# Altium PCB 电机驱动板-V5.0.PcbDoc (part 2 of 3)
Units mil, origin at the board's own origin, x right, y up, seen from the top; angles counter-clockwise.
Board outline 4724.41 x 4330.71 mil, 4 copper layers (Top Layer, NET-A, GND-A, Bottom Layer); 312 components, 201 nets, 977 pads, 515 vias.
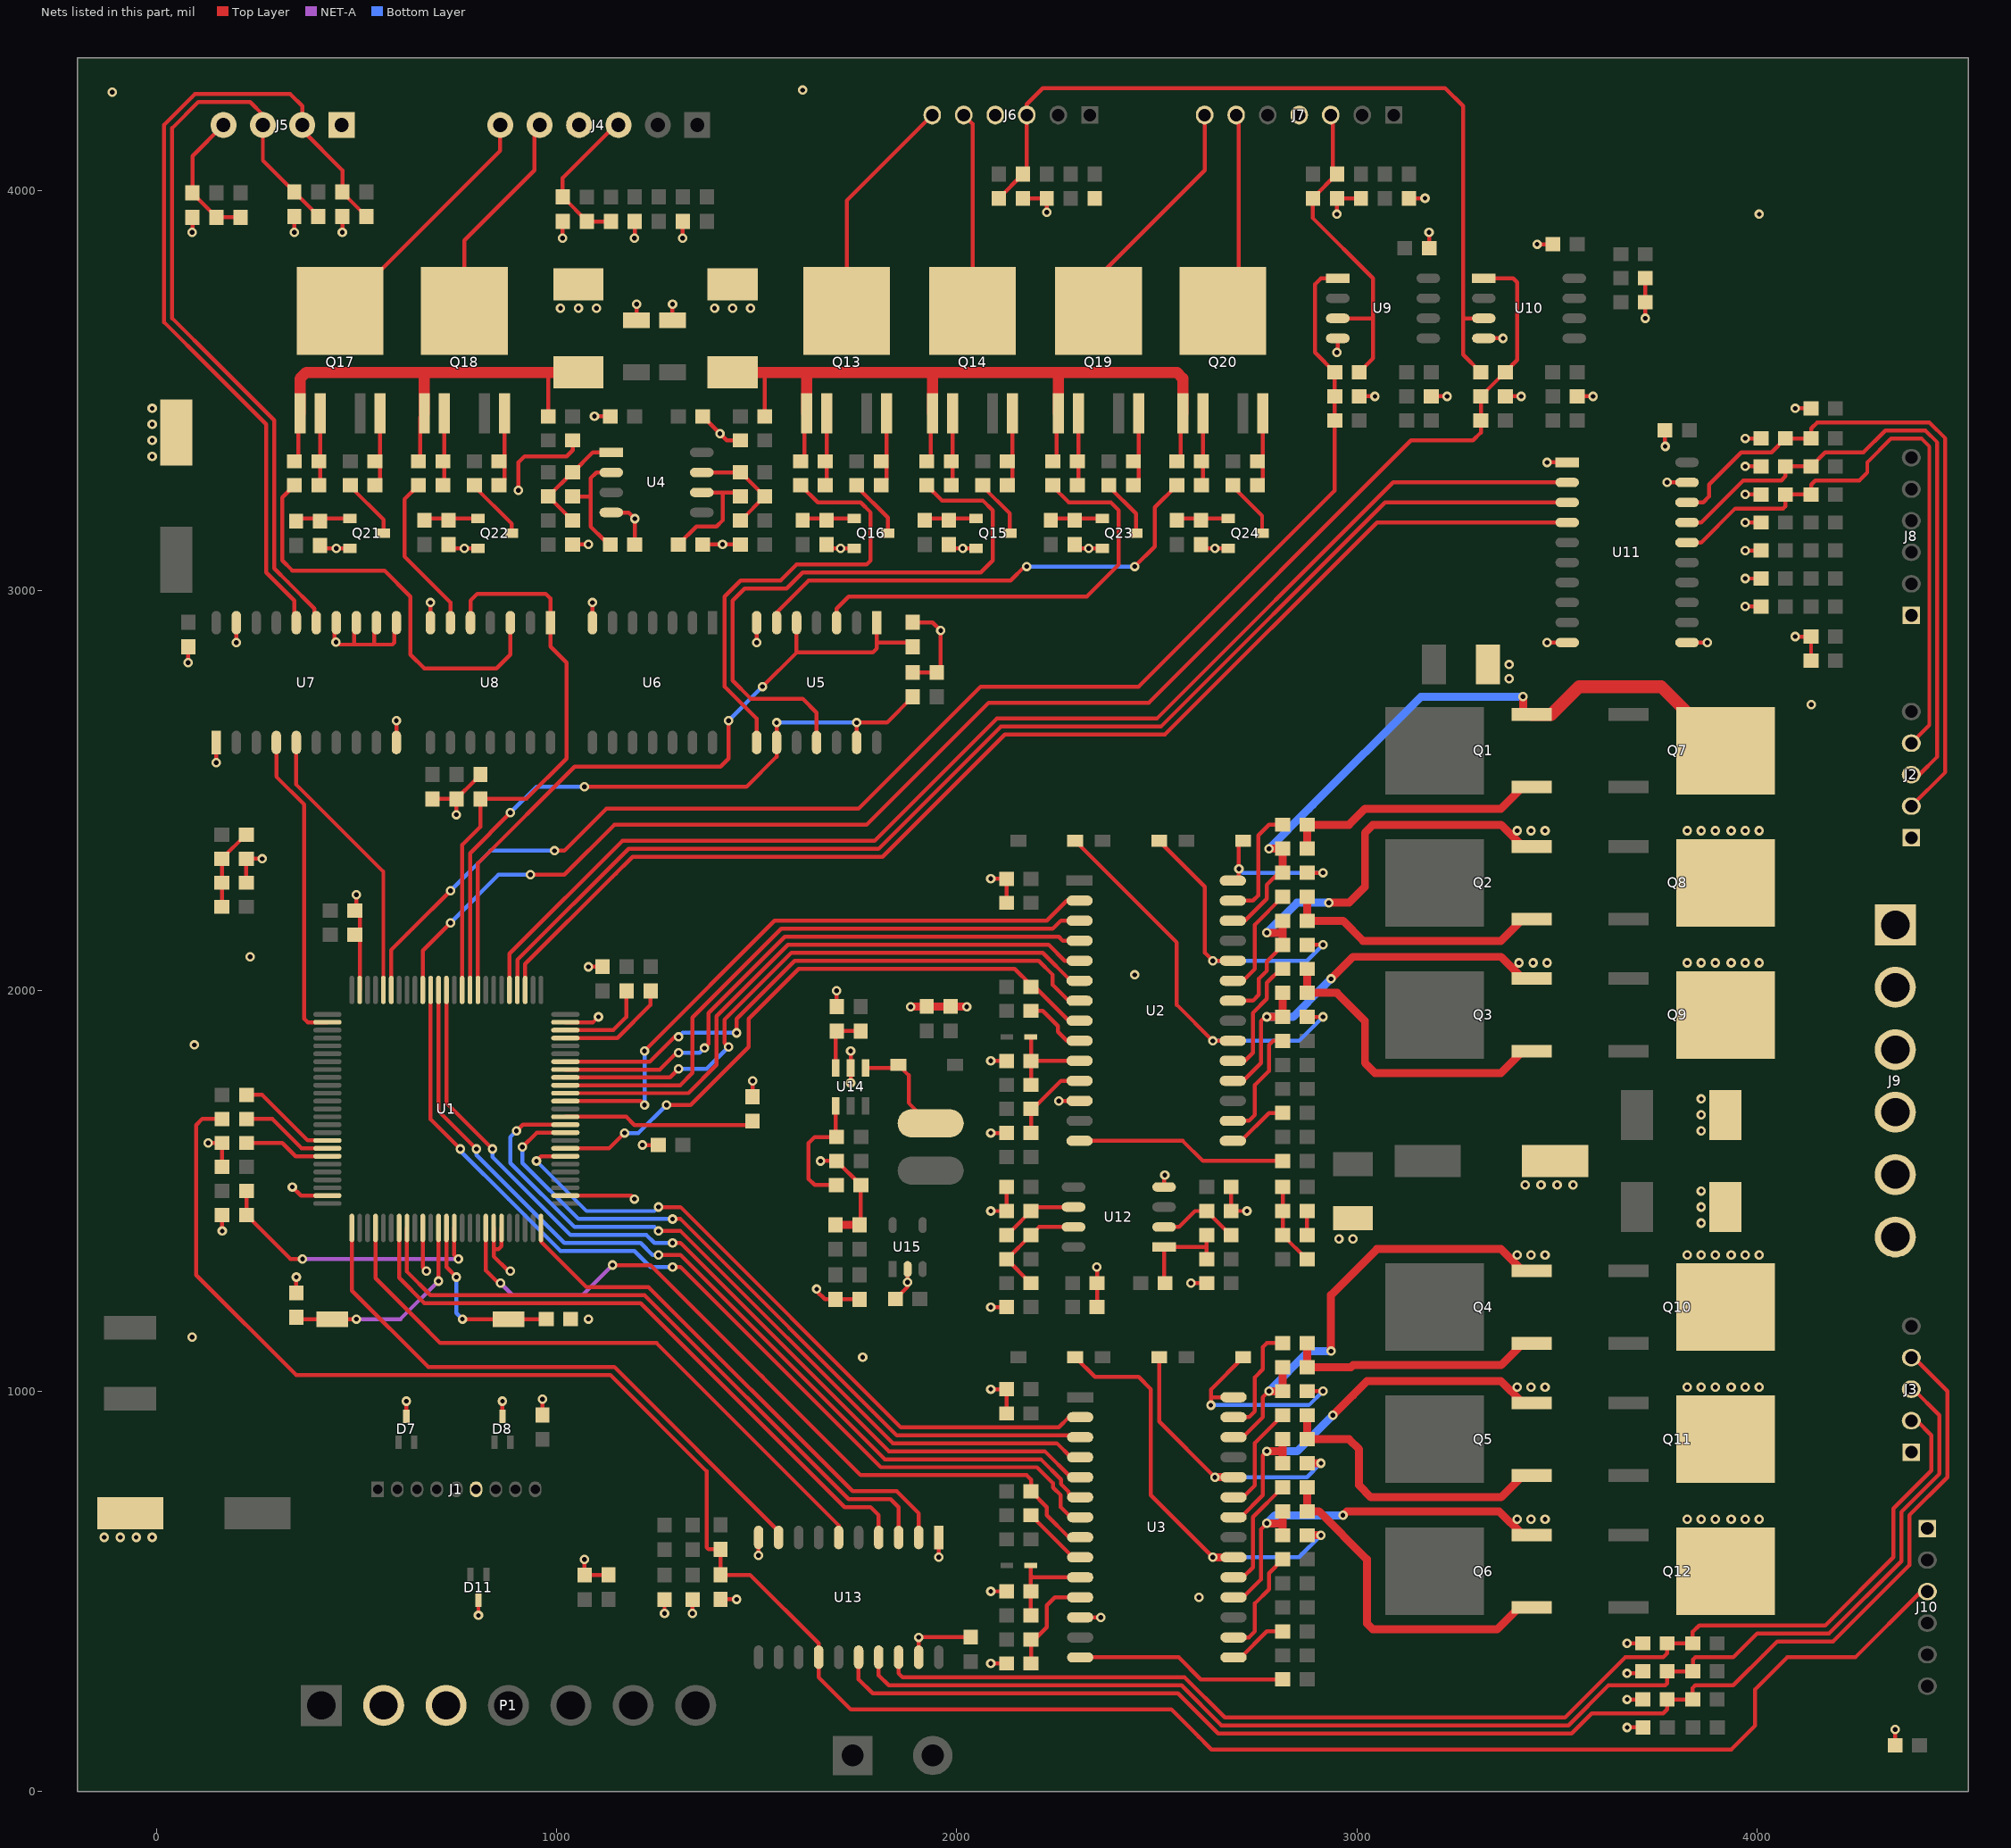
[diagram p4: the nets of this part, all layers, seen from the top]

## Via types
v1: diameter 23.62, hole 11.81, Top Layer to Bottom Layer, tented both sides, 513 vias
v2: diameter 23.62, hole 11.81, Top Layer to Bottom Layer, 2 vias

## Nets (pads, with @x,y where several pads share a name; then routed paths per layer and width w, separated by ;. In a path a pad name is that pad's centre, name@x,y a point inside that pad or via, vN(x,y) a via of type N, cw(c..) or ccw(c..) an arc to the next point about the centre after c; other vN are vias at no path point) (continued)
ENC-R-Z: C63.1 J10.3 R77.2 R149.1 U13.14 | length 5728.5
  Top Layer w10: R149.1@164.49,1680 115,1680 100,1665 100,1290 350,1040 1135,1040 1375,800 1375,735 ; 1375,755 1375,735 ; 1855,205 1865,205 ; 2606.57,135 2597.83,143.73 ; 4085,335 4095,335 ; J10.3@4425,499.37 4409.37,499.37 4245,335 4095,335 ; 1375,735 1375,610 1380,605 R77.2@1410,605 C63.1@1410,541.02 1483.98,541.02 1655,370 U13.14@1655,335.39 1655,285 1735,205 1865,205 ; 1865,205 2536.57,205 2597.83,143.73 ; 2597.83,143.73 2636.57,105 3935,105 3995,165 3995,255 4075,335 4095,335
ENC-R-Z1: U1.4 U13.6 | length 1620.5
  Top Layer w10: U1.4@547.83,1407.76 547.83,1282.17 652.5,1177.5 ; 626.57,1203.43 652.5,1177.5 ; 1225,1120 1240,1120 ; U13.6@1705,634.61 1705,665 1250,1120 1240,1120 ; 652.5,1177.5 710,1120 1240,1120
ENC-W-L: C70.1 R84.1 R87.2 U1.66 U10.1 | length 3779.3
  Top Layer w10: U1.66@665.94,2002.24 665.94,2100.94 v1(735,2170) ; v1(935,2290) 1020,2290 1145,2415 1775,2415 2080,2720 2480,2720 3135,3375 3290,3375 3309.49,3394.49 R84.1@3309.49,3425 C70.1@3309.49,3485 R87.2@3369.49,3545 ; U10.1@3316.94,3780 3390,3780 3400,3770 3400,3575.51 R87.2@3369.49,3545 ; R87.2@3370.51,3545 R87.2@3369.49,3545
  Bottom Layer w10: v1(735,2170) 855,2290 v1(935,2290)
ENC-W-L1: C24.1 J6.3 R41.1 R87.1 U10.3 | length 2125.1
  Top Layer w10: R41.1@2105,3979.49 2165,4039.49 C24.1@2165,4040.51 2175.05,4050.56 J6.3@2175.05,4187.8 2175.05,4215.05 2215,4255 3220,4255 3265,4210 3265,3665 3265,3589.49 R87.1@3309.49,3545 ; 3265,3680 U10.3@3316.94,3680
ENC-W-R: C69.1 R82.1 R86.2 U1.70 U9.1 | length 3551.8
  Top Layer w10: U1.70@587.2,2002.24 587.2,2102.2 640.09,2155.09 ; 626.57,2141.57 640.09,2155.09 ; v1(735,2250) 640.09,2155.09 ; v1(995,2350) 1020,2350 1125,2455 1755,2455 2060,2760 2455,2760 2944.49,3249.49 R82.1@2944.49,3425 C69.1@2944.49,3485 ; C69.1@2945.51,3485 C69.1@2944.49,3485 ; U9.1@2951.94,3780 2910,3780 2895,3765 2895,3594.49 R86.2@2944.49,3545 C69.1@2944.49,3485
  Bottom Layer w10: v1(735,2250) 835,2350 v1(995,2350)
ENC-W-R1: C26.1 J7.3 R43.1 R86.1 U9.3 | length 838.6
  Top Layer w10: J7.3@2934.42,4187.8 2940,4182.22 2940,4050.51 C26.1@2950,4040.51 2890,3980.51 R43.1@2890,3979.49 2890,3930 3040,3780 3040,3680 ; U9.3@2951.94,3680 3040,3680 ; R86.1@3005.51,3545 3035,3574.49 3035,3575 3040,3580 3040,3680
FAULT-L: R11.1 U1.33 U2.8 | length 1567.7
  Top Layer w10: U1.33@1022.24,1606.57 1131.57,1606.57 v1(1170,1645) ; v1(1275,1715) 1335,1715 1480,1860 1480,1930 1605,2055 2145,2055 2185.51,2014.49 R11.1@2185.51,2010 2195,2010 2279.73,1925.27 U2.8@2306.87,1925.27
  Bottom Layer w10: v1(1170,1645) 1205,1645 v1(1275,1715)
FAULT-R: R151.1 U1.18 U3.8 | length 1993.4
  Top Layer w10: U1.18@823.43,1407.76 823.43,1301.57 v1@855,1270 ; v1(1140,1315) 1235,1315 1525,1025 ; 1510,1040 1525,1025 ; U3.8@2290,635 U3.8@2308.46,635 2280,635 2225,690 2225,710.51 R151.1@2185.51,750 2185.51,779.49 2175,790 1760,790 1525,1025
  NET-A w10: v1(860,1270) 890,1240 1065,1240 v1(1140,1315)
GND: C1.2 C2.2 C3.2 C4.2 C7.1 C12.2 C13.2 C14.2 C15.2 C16.1 C17.1 C18.1 C19.2 C20.1 C21.2 C22.1 C23.2 C24.2 C25.2 C26.2 C27.2 C28.2 C29.2 C30.2 C31.2 C32.1 C33.1 C34.1 C35.1 C36.2 C37.1 C38.2 C39.2 C40.2 C41.2 C42.1 C43.2 C44.1 C45.2 C46.2 C47.2 C48.2 C49.2 C50.2 C51.2 C52.2 C53.2 C54.2 C55.2 C56.2 C57.1 C58.2 C59.2 C60.2 C61.2 C62.2 C63.2 C64.2 C65.1 C66.1 C67.1 C68.2 C69.2 C70.2 C71.2 C72.1 C73.2 C74.2 C75.2 C76.2 C77.2 C78.2 C79.2 C80.1 C81.2 C82.2 C83.2 C84.2 C85.2 C86.2 C87.2 C88.1 C89.2 C90.2 C91.2 C92.1 C93.1 D7.3 D8.3 D11.3 J1.6 J2.1 J3.1 J4.4 J5.1 J6.4 J7.4 J8.1 J10.1 P1.2 P1.3 Q15.2 Q16.2 Q21.2 Q22.2 Q23.2 Q24.2 R15.2 R30.1 R31.1 R34.1 R35.1 R38.1 R54.2 R55.2 R69.1 R71.2 R79.1 R80.1 R81.1 R103.2 R105.2 R106.1 R109.1 R119.2 R123.2 R130.1 R134.1 R135.1 R136.2 R140.1 R142.1 R144.2 R145.1 R146.1 U1.10 U1.19 U1.20 U1.27 U1.49 U1.74 U1.99 U2.12 U3.12 U4.4 U5.7 U6.7 U7.1 U7.10 U7.11 U7.12 U7.13 U7.14 U7.19 U8.7 U9.4 U10.4 U11.1 U11.10 U11.11 U11.19 U12.4 U13.1 U13.10 U13.19 U14.2 U15.2 | length 7677.1
  Top Layer w10: v1(80,2820) C44.1@80,2859.49 ; v1(90,3895) 90.68,3895.68 C41.2@90.68,3932.29 ; v1(130,1620) R38.1@164.49,1620 C33.1@164.49,1560 ; v1(150,2570) U7.1@150,2620.39 ; C18.1@164.49,1440 164.49,1400.51 v1(165,1400) ; v1(200,2870) U7.19@200,2919.61 ; R144.2@225,2270 C81.2@225,2330 v1(265,2330) ; v1(340,1510) 361.54,1488.46 U1.99@427.76,1488.46 ; v1(345,3895) C27.2@345,3934.49 ; C16.1@350,1245.51 v1(350,1285) ; R130.1@409.41,3112.29 416.3,3105.4 Q21.2@483.35,3105.4 ; U7.14@445,2919.61 445,2875 455,2865 495,2865 ; v1(465,3895) C28.2@465,3934.49 ; C37.1@485,2211.02 C37.1@496.02,2200 508.46,2187.56 U1.74@508.46,2002.24 ; U7.13@495,2919.61 495,2865 ; C37.1@500,2206.02 v1(500,2240) ; U7.12@545,2919.61 545,2865 ; U7.11@595,2919.61 595,2870 590,2865 545,2865 ; U7.10@600,2620.39 v1(600,2675) ; D7.3@625,937.48 v1(625,975) ; U1.10@665.94,1407.76 665.94,1309.06 v1(675,1300) ; U8.7@685,2925 v1@685,2969.61 ; C67.1@690,2479.49 690.51,2480 749.49,2480 C76.2@750,2479.49 ; R136.2@730,3114.49 739.09,3105.4 Q22.2@803.35,3105.4 ; v1(750,2440) C76.2@750,2479.49 ; R79.1@796.11,2526.11 796.11,2525.6 C76.2@750,2479.49 ; v1(805,440) D11.3@805,477.52 ; U1.19@843.11,1407.76 843.11,1355 ; U1.20@862.8,1407.76 862.8,1362.8 855,1355 843.11,1355 ; D8.3@865,937.48 v1(865,975) ; v1@880,1300 843.11,1336.89 843.11,1355 ; v1(905,3250) 905,3320 920,3335 1025,3335 1040.51,3350.51 C85.2@1040.51,3375 ; C7.1@965,940.51 v1(965,980) ; v1@1015,3885 1015.68,3885.68 C40.2@1015.68,3922.29 ; U1.27@1022.24,1488.46 1186.54,1488.46 v1(1195,1480) ; U1.49@1022.24,1921.54 1091.54,1921.54 v1(1105,1935) ; C36.2@1040.51,3115 v1(1080,3115) ; v1(1070,580) R134.1@1070,540.51 1070.51,541.02 C57.1@1130,541.02 ; v1(1080,2060) 1080.51,2060.51 C35.1@1115,2060.51 ; U6.7@1090,2919.61 v1(1090,2970) ; v1(1095,3435) C19.2@1134.49,3435 ; U4.4@1136.94,3195 1180,3195 v1(1195.51,3179.49) R54.2@1195.51,3115 ; v1(1195,3880) 1195.68,3880.68 C30.2@1195.68,3922.29 ; C80.1@1200,3674.96 v1(1200,3715) ; v1(1215,1615) C32.1@1254.49,1615 ; v1(1270,445) C61.2@1270,479.49 ; C72.1@1290,3674.96 v1(1290,3715) ; v1(1315,3880) 1315.68,3880.68 C29.2@1315.68,3922.29 ; v1(1340,445) C62.2@1340,479.49 ; R55.2@1365.51,3115 C31.2@1459.49,3115 ; C21.2@1365.51,3435 1425.51,3375 C87.2@1459.49,3375 ; C63.2@1410,480 v1(1450,480) ; R15.2@1490,1735.51 v1(1490,1775) ; v1(1500,2870) U5.7@1500,2919.61 ; v1(1505,590) U13.10@1505,634.61 ; v1(1650,1255) 1650,1250 1670.51,1229.49 C91.2@1697.4,1229.49 R146.1@1757.4,1229.49 ; v1(1660,1575) C82.2@1700,1575 1760,1515 R123.2@1760.51,1515 1760.51,1418.62 C89.2@1757.4,1415.51 ; R106.1@1675,3114.49 1684.09,3105.4 Q16.2@1743.35,3105.4 ; R119.2@1700,1960.51 v1(1700,2000) ; v1(1735,1770) U14.2@1735,1807.24 v1(1735,1850) ; C88.1@1846.89,1230 1877.4,1260.51 U15.2@1877.4,1305 ; R80.1@1890,2795.51 C42.1@1950,2795.51 1960,2805.51 v1(1960,2900) 1939.49,2920.51 R81.1@1890,2920.51 ; U13.19@1905,335.39 v1(1905,385) 1905.51,385.51 C79.2@2035,385.51 ; v1(1955,585) U13.1@1955,634.61 ; R109.1@1980,3114.49 1989.09,3105.4 Q15.2@2048.35,3105.4 ; v1(2085,320) C15.2@2124.49,320 ; v1(2085,500) R35.1@2124.49,500 ; v1(2085,1005) C4.2@2124.49,1005 ; v1(2085,1210) C68.2@2124.49,1210 ; v1(2085,1450) R105.2@2124.49,1450 C13.2@2124.49,1510 ; v1(2085,1645) C14.2@2124.49,1645 ; v1(2085,1825) R34.1@2124.49,1825 ; v1(2085,2280) C2.2@2124.49,2280 C1.2@2124.49,2220 ; C3.2@2124.52,944.4 C4.2@2124.49,1005 ; C24.2@2165,3979.49 C23.2@2225,3979.49 v1(2225,3945) ; v1(2255,1725) 2255.27,1725.27 U2.12@2306.87,1725.27 ; R140.1@2295,3114.49 2304.09,3105.4 Q23.2@2363.35,3105.4 ; U3.12@2308.46,435 v1(2360,435) ; v1(2350,1310) 2350.51,1309.49 C75.2@2350.51,1270 C77.2@2350.51,1210 ; U12.4@2518.06,1510 2518.06,1543.06 v1@2520,1545 ; v1(2585,1270) C78.2@2624.49,1270 ; R142.1@2610,3114.49 2619.09,3105.4 Q24.2@2678.35,3105.4 ; C12.2@2685.51,1510 R103.2@2685.51,1450 v1(2725,1450) ; R71.2@2875.51,1390 C55.2@2875.51,1450 ; v1(2950,3595) 2951.94,3596.94 U9.4@2951.94,3630 ; v1(2950,3940) C26.2@2950,3979.49 C25.2@3010,3979.49 ; C69.2@3005.51,3485 v1(3045,3485) ; C39.2@3130,3979.49 3169.49,3979.49 v1(3170,3980) ; v1(3180,3895) 3180.51,3894.49 C65.1@3180.51,3855 ; C73.2@3185.51,3485 v1(3225,3485) ; U10.4@3316.94,3630 v1(3365,3630) ; C70.2@3370.51,3485 v1(3410,3485) ; v1(3450,3865) C66.1@3489.49,3865 ; v1(3475,2870) U11.10@3525.39,2870 ; v1(3475,3320) U11.1@3525.39,3320 ; C74.2@3550.51,3485 v1(3590,3485) ; v1(3675,160) C64.2@3714.49,160 ; v1(3675,230) C60.2@3713.98,230 ; v1(3675,295) 3708.98,295 C59.2@3713.98,300 ; v1(3675,370) C58.2@3713.98,370 ; v1(3720,3680) 3720.51,3680.51 R69.1@3720.51,3720 C52.2@3720.51,3780 ; C71.2@3769.49,3400 3769.49,3360.51 v1(3770,3360) ; v1(3775,3270) U11.19@3824.61,3270 ; U11.11@3824.61,2870 v1(3875,2870) ; v1(3970,2960) C51.2@4009.49,2960 ; v1(3970,3030) C50.2@4009.49,3030 ; v1(3970,3100) C49.2@4009.49,3100 ; v1(3970,3170) C48.2@4009.49,3170 ; v1(3970,3240) C47.2@4009.49,3240 ; v1(3970,3310) C46.2@4009.49,3310 ; v1(3970,3380) C45.2@4009.49,3380 ; v1(4095,2885) C22.1@4134.49,2885 C20.1@4134.49,2825 ; v1(4095,3455) C43.2@4134.49,3455 ; C56.2@4344.49,115 4344.49,154.49 v1(4345,155) ; 495,2865 545,2865
  Top Layer w20: C90.2@1697.4,1415.51 C89.2@1757.4,1415.51 ; v1(1885,1960) 1886.02,1961.02 C83.2@1925,1961.02 C84.2@1985,1961.02 2023.98,1961.02 v1(2025,1960)
  other v1: 2605,485 -130,635 -90,635 -50,635 -10,635 1765,1085 90,1135 1080,1180 1877.4,1272.4 885,1300 2955,1380 2990,1380 3860,1420 3860,1460 3860,1500 3420,1515 3460,1515 3500,1515 3540,1515 2520,1540 3860,1650 3860,1690 3860,1730 95,1865 2445,2040 235,2085 4135,2715 3380,2780 3380,2815 449.12,2870.88 685,2970 450,3105.4 770,3105.4 1710,3105.4 2015,3105.4 2330,3105.4 2645,3105.4 1415,3115 -10,3335 -10,3375 1408.46,3392.05 -10,3415 -10,3455 1010,3705 1055,3705 1100,3705 1395,3705 1440,3705 1485,3705 1015,3880 4005,3940 -110,4245 1615,4250
HALL-L-B: C47.1 J2.4 R63.2 U11.16 | length 1537.5
  Top Layer w10: U11.16@3824.61,3120 3860,3120 3945,3205 4065,3205 4070.51,3210.51 C47.1@4070.51,3240 R63.2@4134.49,3240 4135,3240.51 4135,3265 4145,3275 4255,3275 4275,3295 4275,3320 4335,3380 4395,3380 ; J2.4@4385,2618.74 4430,2663.74 4430,3360 4410,3380 4395,3380 ; 4385,3380 4395,3380
HALL-L-B1: U1.53 U11.4 | length 3139.2
  Top Layer w10: U1.53@921.85,2002.24 921.85,2066.85 1140,2285 ; 1150,2295 1140,2285 ; U11.4@3525.39,3170 3050,3170 2520,2640 2120,2640 1815,2335 1190,2335 1140,2285
HALL-L-G: C46.1 J2.3 R62.2 U11.17 | length 1616.1
  Top Layer w10: U11.17@3824.61,3170 3860,3170 3965,3275 4060,3275 4070.51,3285.51 C46.1@4070.51,3310 R62.2@4134.49,3310 4169.49,3345 4265,3345 4320,3400 4420,3400 4450,3370 4450,2585 4405,2540 J2.3@4385,2540
HALL-L-G1: U1.54 U11.3 | length 3171.5
  Top Layer w10: U1.54@902.17,2002.24 902.17,2077.17 1180,2355 1805,2355 2110,2660 2510,2660 3070,3220 U11.3@3525.39,3220
HALL-L-Y: C45.1 J2.2 R61.2 U11.18 | length 1736.2
  Top Layer w10: U11.18@3824.61,3220 3865,3220 3880,3235 3880,3265 3960,3345 3990,3345 ; 3980,3345 3990,3345 ; R61.2@4135,3380.51 R61.2@4134.49,3380 C45.1@4070.51,3380 4035.51,3345 3990,3345 ; R61.2@4135,3385 4135,3405 4150,3420 4430,3420 4470,3380 4470,2546.26 J2.2@4385,2461.26
HALL-L-Y1: U1.55 U11.2 | length 3220.9
  Top Layer w10: U1.55@882.48,2002.24 882.48,2092.48 1165,2375 1795,2375 2100,2680 2500,2680 3090,3270 U11.2@3525.39,3270
HALL-R-B: C60.1 J3.4 R74.2 U13.16 | length 3567.5
  Top Layer w10: U13.16@1755,335.39 1755,280 1790,245 1895,245 ; 1885,245 1895,245 ; 4015,340 4050,375 4190,375 4380,565 4380,690 4475,785 4475,1000 4391.26,1083.74 J3.4@4385,1083.74 ; 4026.72,351.72 3940,265 3845,265 3838.98,258.98 R74.2@3838.98,230 C60.1@3775,230 3775,205 3765,195 3586.57,195 3536.57,145 2653.14,145 2553.14,245 1895,245
HALL-R-B1: U1.7 U13.4 | length 1638.8
  Top Layer w10: U1.7@606.89,1407.76 606.89,1283.11 670,1220 1070,1220 ; 1055,1220 1070,1220 ; U13.4@1805,634.61 1805,690 1785,710 1720,710 1210,1220 1070,1220
HALL-R-G: C59.1 J3.3 R73.2 U13.17 | length 3372.7
  Top Layer w10: U13.17@1805,335.39 1805,290 1830,265 2561.42,265 2661.42,165 3528.28,165 3628.28,265 3770,265 3775,270 C59.1@3775,300 R73.2@3838.98,300 3840,301.02 3840,330 3845,335 3940,335 4000,395 4045,395 ; 4030.15,395 4045,395 ; J3.3@4385,1005 4390,1005 4455,940 4455,793.28 4360,698.28 4360,575 4180,395 4045,395
HALL-R-G1: U1.8 U13.3 | length 1656.9
  Top Layer w10: U1.8@626.57,1407.76 626.57,1298.43 685,1240 1220,1240 1730,730 1835,730 1855,710 U13.3@1855,634.61
HALL-R-Y: C58.1 J3.2 R72.2 U13.18 | length 3218.2
  Top Layer w10: U13.18@1855,345.39 1855,295 1865,285 1955,285 ; 1940,285 1955,285 ; 3850,410 3838.98,398.98 ; J3.2@4385,926.26 4398.74,926.26 4435,890 4435,801.57 4340,706.57 4340,585 4170,415 3855,415 3838.98,398.98 ; 1955,285 2569.71,285 2669.71,185 3520,185 3670,335 3765,335 3775,345 C58.1@3775,370 R72.2@3838.98,370 3838.98,398.98
HALL-R-Y1: U1.25 U13.2 | length 1319.3
  Top Layer w10: U1.25@961.22,1407.76 961.22,1373.78 1075,1260 1230,1260 1740,750 1850,750 1905,695 U13.2@1905,634.61
HEAD_IO_L: U1.77 U7.4 | length 780.7
  Top Layer w10: U7.4@300,2620.39 300,2535 370,2465 370,1930 378.46,1921.54 U1.77@427.76,1921.54
HEAD_IO_L1: C28.1 J5.2 R45.1 U7.16 | length 2159.5
  Top Layer w10: 167.5,3522.5 132.08,3557.92 ; U7.16@345,2919.61 345,2975 275,3045 275,3415 132.08,3557.92 ; R45.1@525,3934.49 465,3994.49 465,4050 364.89,4150.11 J5.2@364.89,4162.8 364.89,4210.11 335,4240 96.57,4240 20,4163.43 20,3670 132.08,3557.92
HEAD_IO_R: U1.71 U7.5 | length 708.2
  Top Layer w10: U7.5@350,2620.39 350,2515 567.52,2297.48 U1.71@567.52,2002.24
HEAD_IO_R1: C27.1 J5.3 R44.1 U7.15 | length 1974.5
  Top Layer w10: 157.5,3562.5 147.5,3572.5 ; U7.15@395,2919.61 395,2955 330,3020 295,3055 295,3425 147.5,3572.5 ; R44.1@405,3934.49 405,3935.51 C27.1@345,3995.51 266.46,4074.05 J5.3@266.46,4162.8 266.46,4188.54 235,4220 104.85,4220 40,4155.15 40,3680 147.5,3572.5
IIC-SCL-L: R147.2 U1.47 | length 281.6
  Top Layer w10: U1.47@1022.24,1882.17 1152.17,1882.17 1235,1965 R147.2@1235,1999.49
IIC-SCL-R: R150.2 U1.92 | length 249.4
  Top Layer w10: R150.2@225.51,1740 265,1740 378.74,1626.26 U1.92@427.76,1626.26
IIC-SDA-L: R60.2 U1.48 | length 231
  Top Layer w10: U1.48@1022.24,1901.85 1141.85,1901.85 1175,1935 R60.2@1175,1999.49
IIC-SDA-R: R149.2 U1.93 | length 232.7
  Top Layer w10: R149.2@225.51,1680 290,1680 363.43,1606.57 U1.93@427.76,1606.57
MOT-H-A: J4.6 Q17.5 | length 630
  Top Layer w10: Q17.5@459.38,3698.57 859.61,4098.8 J4.6@859.61,4162.8
MOT-H-B: J4.5 Q18.5 | length 542.1
  Top Layer w10: Q18.5@769.97,3698.57 769.97,3874.97 945,4050 945,4149.76 J4.5@958.04,4162.8
MOT-L-B: C5.2 J9.1 Q1.2 Q7.3 R1.1 U2.26 | length 1742
  Top Layer w10: U2.26@2689.94,2175.27 2720.27,2175.27 2775,2230 2775,2265 2805,2295 C5.2@2814.49,2295
  Top Layer w20: v1(2780,2355) R1.1@2814.49,2355 C5.2@2814.49,2295 ; v2(3415,2735) 3415,2691.1 3414.45,2690.55 Q1.2@3436.06,2690.55
  Top Layer w32: Q1.2@3436.06,2690.55 3485.55,2690.55 3555,2760 3760,2760 3920,2600 Q7.3@3921.06,2600
  Bottom Layer w20: v1(2780,2355) 2880,2455 ; 2890,2465 2880,2455 ; v2(3415,2735) 3160,2735 2880,2455
MOT-L-G: C8.2 J9.2 Q2.2 Q8.3 R2.1 U2.22 | length 1194.8
  Top Layer w10: U2.22@2689.94,1975.27 2740.27,1975.27 2755,1990 2755,2030 2775,2050 2775,2073.14 2814.49,2112.63 C8.2@2814.49,2115
  Top Layer w20: v1(2775,2145) 2814.49,2145 ; C8.2@2814.49,2115 2814.49,2145 ; R2.1@2814.49,2175 2814.49,2145 ; v1(2930,2220) 2980,2220 3020,2260 3020,2395 3040,2415 3360,2415 3414.45,2360.55 Q2.2@3436.06,2360.55
  Bottom Layer w20: v1(2775,2145) 2850,2220 v1(2930,2220)
  other v1: 3400,2400 3435,2400 3470,2400 3825,2400 3860,2400 3895,2400 3935,2400 3970,2400 4005,2400
MOT-L-Y: C10.2 J9.3 Q3.2 Q9.3 R3.1 U2.18 | length 1094.3
  Top Layer w10: U2.18@2689.94,1775.27 2715.27,1775.27 2760,1820 2760,1925 2770,1935 v1(2775,1935)
  Top Layer w20: v1(2775,1935) C10.2@2814.49,1935 R3.1@2814.49,1995 ; v1(2935,2030) 2955,2050 ; 2946.81,2041.81 2990,2085 3360,2085 3414.45,2030.55 Q3.2@3436.06,2030.55
  Bottom Layer w20: v1(2775,1935) 2840,1935 2917.5,2012.5 ; 2900,1995 2917.5,2012.5 ; v1(2935,2030) 2917.5,2012.5
  other v1: 3405,2070 3440,2070 3475,2070 3825,2070 3860,2070 3895,2070 3935,2070 3970,2070 4005,2070
MOT-R-B: C6.2 J9.4 Q4.2 Q10.3 R4.1 U3.26 | length 1197.5
  Top Layer w10: U3.26@2691.54,885 2715,885 2765,935 2765,985 v1(2780,1000)
  Top Layer w20: v1(2780,1000) C6.2@2814.49,1000 R4.1@2814.49,1060 ; v1(2935,1100) 2935,1175 ; 2935,1205 2935,1175 ; Q4.2@3436.06,1300.55 3414.45,1300.55 3360,1355 3050,1355 2935,1240 2935,1175
  Bottom Layer w20: v1(2780,1000) 2880,1100 v1(2935,1100)
  other v1: 3400,1340 3435,1340 3470,1340 3825,1340 3860,1340 3895,1340 3935,1340 3970,1340 4005,1340
MOT-R-G: C9.2 J9.5 Q5.2 Q11.3 R5.1 U3.22 | length 1083.6
  Top Layer w10: U3.22@2691.54,685 2710,685 2765,740 2765,840 v1(2775,850)
  Top Layer w20: v1(2775,850) 2809.49,850 2814.49,845 ; C9.2@2814.49,820 2814.49,845 ; R5.1@2814.49,880 2814.49,845 ; v1(2940,940) 2990,990 ; 2978.99,978.99 3025,1025 3360,1025 3414.45,970.55 Q5.2@3436.06,970.55
  Bottom Layer w20: v1(2775,850) 2850,850 v1(2940,940)
  other v1: 3400,1010 3435,1010 3470,1010 3825,1010 3860,1010 3895,1010 3935,1010 3970,1010 4005,1010
MOT-R-Y: C11.2 J9.6 Q6.2 Q12.3 R6.2 U3.18 | length 1033.5
  Top Layer w10: U3.18@2691.54,485 2715,485 2760,530 2760,655 v1(2775,670)
  Top Layer w20: v1(2775,670) 2814.49,670 ; C11.2@2814.49,640 2814.49,670 ; R6.2@2814.49,700 2814.49,670 ; v1(2965,690) 2975,700 3355,700 3414.45,640.55 Q6.2@3436.06,640.55
  Bottom Layer w20: v1@2776.81,671.81 v1(2775,670) 2795,690 v1(2965,690)
  other v1: 3400,680 3435,680 3470,680 3825,680 3860,680 3895,680 3935,680 3970,680 4005,680
MOT-STOP1: U1.1 U13.9 | length 1487.2
  Top Layer w10: U1.1@488.78,1407.76 488.78,1251.22 680,1060 1145,1060 1555,650 U13.9@1555,634.61
MOT-W-LA: J6.6 Q13.5 | length 577.8
  Top Layer w10: Q13.5@1724.97,3698.57 1724.97,3973.94 J6.6@1938.83,4187.8
MOT-W-LB: J6.5 Q14.5 | length 498.3
  Top Layer w10: J6.5@2017.57,4187.8 2039.38,4165.99 Q14.5@2039.38,3698.57
MOT-W-RA: J7.7 Q19.5 | length 599
  Top Layer w10: Q19.5@2354.38,3698.57 2354.38,3784.38 2619.46,4049.46 J7.7@2619.46,4187.8
MOT-W-RB: J7.6 Q20.5 | length 508.6
  Top Layer w10: Q20.5@2664.97,3698.57 2705,3738.6 2705,4181 J7.6@2698.2,4187.8
NetC5_1: C5.1 D5.2 U2.28 | length 358.1
  Top Layer w10: U2.28@2705,2275 2705,2340 2705,2364.13 D5.2@2715.87,2375 ; C5.1@2875.51,2295 v1(2915,2295)
  Bottom Layer w10: v1(2705,2305) 2715,2295 v1(2915,2295)
NetC6_1: C6.1 D6.2 U3.28 | length 559.4
  Top Layer w10: v1(2635,965) 2635,985 ; U3.28@2691.54,985 2635,985 ; D6.2@2705,1074.13 D6.2@2715.87,1085 2635,1004.13 2635,985 ; C6.1@2875.51,1000 v1(2915,1000)
  Bottom Layer w10: v1(2635,965) 2880,965 v1(2915,1000)
NetC8_1: C8.1 D3.2 U2.24 | length 736.1
  Top Layer w10: D3.2@2505.87,2375 2505.87,2374.13 2620,2260 2620,2095.55 2640.27,2075.27 U2.24@2689.94,2075.27 ; C8.1@2875.51,2115 v1(2915,2115)
  Bottom Layer w10: v1(2640,2075) 2875,2075 v1(2915,2115)
NetC9_1: C9.1 D4.2 U3.24 | length 718.2
  Top Layer w10: D4.2@2505.87,1085 2505.87,924.13 v1(2645,785)
  Top Layer w20: v1(2645,785) U3.24@2691.54,785 ; C9.1@2875.51,820 v1(2910,820)
  Bottom Layer w10: v1(2645,785) 2875,785 v1(2910,820)
NetC10_1: C10.1 D1.2 U2.20 | length 1031.9
  Top Layer w10: D1.2@2295.87,2375 2550,2120.87 2550,1965 v1(2640,1875) 2689.67,1875 U2.20@2689.94,1875.27 ; C10.1@2875.51,1935 v1(2915,1935)
  Bottom Layer w10: v1(2640,1875) 2855,1875 v1(2915,1935)
NetC11_1: C11.1 D2.2 U3.20 | length 1085.3
  Top Layer w10: D2.2@2295.87,1085 2345.43,1035.43 2454.57,1035.43 2485,1005 2485,740 v1(2640,585)
  Top Layer w20: v1(2640,585) U3.20@2691.54,585 ; C11.1@2875.51,640 v1(2910,640)
  Bottom Layer w10: v1(2640,585) 2855,585 v1(2910,640)
NetC14_1: C14.1 R26.2 U2.11 | length 210.5
  Top Layer w10: C14.1@2185.51,1645 R26.2@2185.51,1705 2190,1705 2260.27,1775.27 U2.11@2306.87,1775.27
NetC15_1: C15.1 R27.2 U3.11 | length 269.5
  Top Layer w10: C15.1@2185.51,320 R27.2@2185.51,380 2195,380 2225,410 2225,465 ; 2232.64,472.64 2225,465 ; U3.11@2308.46,485 2245,485 2225,465
NetC16_2: C16.2 U1.12 X1.2 | length 546.5
  Top Layer w10: C16.2@345.51,1180 X1.2@440,1180 ; X1.2@429.49,1169.49 X1.2@440,1180 ; v1(500,1180) X1.2@440,1180 ; v1@705.31,1275 U1.12@705.31,1407.76
  NET-A w10: v1(500,1180) 610,1180 v1(705,1275)
NetC17_2: C17.2 U1.13 X1.1 | length 498.7
  Top Layer w10: U1.13@725,1407.76 725,1310 v1(750,1285) ; v1(765,1180) X1.1@880,1180 ; X1.1@850,1180 X1.1@880,1180 ; X1.1@890.51,1169.49 X1.1@880,1180 ; C17.2@974.49,1180 X1.1@880,1180
  Bottom Layer w10: v1(750,1285) 750,1195 v1(765,1180)
NetC18_2: C18.2 R48.1 U1.14 | length 717.6
  Top Layer w10: R48.1@225.51,1500 C18.2@225.51,1440 335.51,1330 v1(365.51,1330) ; U1.14@744.68,1407.76 744.68,1340.32 v1(755,1330)
  NET-A w10: v1@365,1330 v1(755,1330)
NetC40_1: C40.1 J4.3 R56.1 R58.1 | length 387.4
  Top Layer w10: R58.1@1136.27,3921.82 1077.17,3921.82 C40.1@1015.68,3983.31 1015.68,4030.68 1147.8,4162.8 J4.3@1154.89,4162.8
NetC41_1: C41.1 J5.4 R57.1 R59.1 | length 347.4
  Top Layer w10: J5.4@168.04,4162.8 90.68,4085.44 C41.1@90.68,3993.31 90.68,3992.29 R57.1@150.68,3932.29 R59.1@210.68,3932.29
NetC55_1: C55.1 R68.2 R70.2 R71.1 | length 210.1
  Top Layer w10: R68.2@2814.49,1510 C55.1@2814.49,1450 R71.1@2814.49,1390 2875,1329.49 R70.2@2875,1325
NetC81_1: C81.1 R110.2 R138.2 R144.1 | length 205.9
  Top Layer w10: R138.2@163.98,2210 R144.1@163.98,2270 C81.1@163.98,2330 223.98,2390 R110.2@225,2390
NetD9_1: D9.1 R34.2 R152.2 U2.10 | length 241.5
  Top Layer w10: R152.2@2185.51,1765 R34.2@2185.51,1825 ; D9.1@2185.51,1885 R34.2@2185.51,1825 ; U2.10@2306.87,1825.27 2185.79,1825.27 R34.2@2185.51,1825
NetD10_1: D10.1 R13.2 R35.2 U3.10 | length 262.8
  Top Layer w10: R13.2@2185,430.51 2185,540 ; R13.2@2185,440.51 R13.2@2185.51,440 ; D10.1@2185,560 2185,540 ; U3.10@2303.46,530 U3.10@2308.46,535 2190,535 2185,540
NetD12_1: D12.1 L1.2 U14.1 | length 266.8
  Top Layer w10: U14.1@1772.4,1807.24 1846.38,1807.24 D12.1@1854.13,1815 1880,1789.13 1880,1720 1930.95,1669.05 L1.2@1935,1669.05
NetQ13_1: Q13.1 Q14.1 Q19.1 Q20.1 R100.1 R101.1 R128.1 R129.1 R139.2 R145.2 | length 2164.6
  Top Layer w10: R145.2@1440,3545 R145.2@1465,3545 ; R139.2@1520.51,3435 1520.51,3545 ; R101.1@1610.16,3322.8 1620,3332.64 1620,3437.69 Q13.1@1624.97,3442.66 ; R100.1@1925.16,3322.8 1935,3332.64 1935,3438.28 Q14.1@1939.38,3442.66 ; R128.1@2240.16,3322.8 2250,3332.64 2250,3438.28 Q19.1@2254.38,3442.66 ; R129.1@2550.16,3322.8 2560,3332.64 2560,3437.69 Q20.1@2564.97,3442.66
  Top Layer w28: R145.2@1440,3545 1520.51,3545 1625,3545 1940,3545 ; Q13.1@1624.97,3442.66 1624.97,3544.97 ; Q14.1@1939.38,3442.66 1939.38,3544.38 1940,3545 ; Q19.1@2254.38,3442.66 2254.38,3544.38 2255,3545 ; Q20.1@2564.97,3442.66 2564.97,3530.03 2550,3545 2255,3545 ; 1940,3545 2255,3545
NetQ13_2: Q13.2 R101.2 R107.1 | length 181.4
  Top Layer w10: R107.1@1671.19,3262.8 1674.97,3266.58 Q13.2@1674.97,3442.66
NetQ13_4: Q13.4 R88.1 R94.2 | length 185.6
  Top Layer w10: R94.2@1811.19,3262.8 1824.97,3276.58 Q13.4@1824.97,3442.66
NetQ14_2: Q14.2 R100.2 R108.1 | length 181.2
  Top Layer w10: R108.1@1986.19,3262.8 1989.38,3265.99 Q14.2@1989.38,3442.66
NetQ14_4: Q14.4 R89.1 R97.2 | length 185.3
  Top Layer w10: R97.2@2126.19,3262.8 2139.38,3275.99 Q14.4@2139.38,3442.66
NetQ15_1: Q15.1 R102.2 R109.2 | length 130.3
  Top Layer w10: R102.2@1920,3175.51 1924.69,3180.2 Q15.1@2048.35,3180.2
NetQ15_3: Q15.3 R97.1 | length 148.1
  Top Layer w10: R97.1@2065.16,3262.8 2065.16,3259.84 2133,3192 Q15.3@2133,3142.8
NetQ16_1: Q16.1 R104.1 R106.2 | length 130.3
  Top Layer w10: R104.1@1615,3175.51 1619.69,3180.2 Q16.1@1743.35,3180.2
NetQ16_3: Q16.3 R94.1 | length 152.2
  Top Layer w10: R94.1@1750.16,3262.8 1750.16,3259.84 1828,3182 Q16.3@1828,3142.8
NetQ17_1: Q17.1 Q18.1 R121.2 R122.2 R127.2 R135.2 | length 1268
  Top Layer w10: R121.2@345.16,3322.8 355,3332.64 355,3438.28 Q17.1@359.38,3442.66 ; R122.2@655.16,3322.8 660,3327.64 660,3432.69 Q18.1@669.97,3442.66 ; 980,3545 979.49,3544.49 R127.2@979.49,3435 R127.2@990,3445.51
  Top Layer w28: Q17.1@359.38,3442.66 359.38,3529.38 375,3545 670,3545 980,3545 R135.2@1055,3545 ; Q18.1@669.97,3442.66 669.97,3544.97
NetQ17_2: Q17.2 R121.1 R132.1 | length 181.2
  Top Layer w10: R132.1@406.19,3262.8 409.38,3265.99 Q17.2@409.38,3442.66
NetQ17_4: Q17.4 R111.2 R117.2 | length 185.3
  Top Layer w10: R117.2@546.19,3262.8 559.38,3275.99 Q17.4@559.38,3442.66
NetQ18_2: Q18.2 R122.1 R133.1 | length 181.4
  Top Layer w10: R133.1@716.19,3262.8 719.97,3266.58 Q18.2@719.97,3442.66
NetQ18_4: Q18.4 R112.2 R118.1 | length 185.6
  Top Layer w10: R118.1@856.19,3262.8 869.97,3276.58 Q18.4@869.97,3442.66
NetQ19_2: Q19.2 R128.2 R141.1 | length 181.2
  Top Layer w10: R141.1@2301.19,3262.8 2304.38,3265.99 Q19.2@2304.38,3442.66
NetQ19_4: Q19.4 R115.1 R120.2 | length 185.3
  Top Layer w10: R120.2@2441.19,3262.8 2454.38,3275.99 Q19.4@2454.38,3442.66
NetQ20_2: Q20.2 R129.2 R143.1 | length 181.4
  Top Layer w10: R143.1@2611.19,3262.8 2614.97,3266.58 Q20.2@2614.97,3442.66
NetQ20_4: Q20.4 R116.1 R124.2 | length 185.6
  Top Layer w10: R124.2@2751.19,3262.8 2764.97,3276.58 Q20.4@2764.97,3442.66
NetQ21_1: Q21.1 R126.1 R130.2 | length 136.8
  Top Layer w10: R126.1@349.41,3173.31 356.3,3180.2 Q21.1@483.35,3180.2
NetQ21_3: Q21.3 R117.1 | length 154.3
  Top Layer w10: R117.1@485.16,3262.8 485.16,3259.84 568,3177 Q21.3@568,3142.8
NetQ22_1: Q22.1 R125.2 R136.1 | length 135.3
  Top Layer w10: R125.2@670,3175.51 674.69,3180.2 Q22.1@803.35,3180.2
NetQ22_3: Q22.3 R118.2 | length 158.5
  Top Layer w10: R118.2@795.16,3262.8 795.16,3259.84 888,3167 Q22.3@888,3142.8
NetQ23_1: Q23.1 R137.1 R140.2 | length 130.3
  Top Layer w10: R137.1@2235,3175.51 2239.69,3180.2 Q23.1@2363.35,3180.2
NetQ23_3: Q23.3 R120.1 | length 148.1
  Top Layer w10: R120.1@2380.16,3262.8 2380.16,3259.84 2448,3192 Q23.3@2448,3142.8
NetQ24_1: Q24.1 R131.2 R142.2 | length 130.3
  Top Layer w10: R131.2@2550,3175.51 2554.69,3180.2 Q24.1@2678.35,3180.2
NetQ24_3: Q24.3 R124.1 | length 150.2
  Top Layer w10: R124.1@2690.16,3262.8 2690.16,3259.84 2763,3187 Q24.3@2763,3142.8
NetR7_2: R7.2 U2.27 | length 291
  Top Layer w10: U2.27@2689.94,2225.27 2740.27,2225.27 2753.19,2238.19 2753.19,2388.19 2780,2415 R7.2@2814.49,2415
NetR8_2: R8.2 U3.27 | length 281.6
  Top Layer w10: U3.27@2691.54,935 2730,935 2745,950 2745,1035 2765,1055 2765,1110 2775,1120 R8.2@2814.49,1120
NetR9_2: R9.2 U2.23 | length 276.2
  Top Layer w10: U2.23@2689.94,2025.27 2715.27,2025.27 2745,2055 2745,2165.51 R9.2@2814.49,2235
NetR10_2: R10.2 U3.23 | length 269.7
  Top Layer w10: U3.23@2691.54,735 2715,735 2745,765 2745,870.51 R10.2@2814.49,940
NetR12_2: R12.2 U2.9 | length 160.8
  Top Layer w10: R12.2@2185.51,1950 2215,1950 2252.76,1912.24 2252.76,1897.76 2275.24,1875.27 U2.9@2306.87,1875.27
NetR14_2: R14.2 U3.9 | length 157.6
  Top Layer w10: R14.2@2195,690 R14.2@2185.51,690 U3.9@2290.26,585.26
NetR15_1: R15.1 U1.37 | length 481.2
  Top Layer w10: U1.37@1022.24,1685.32 1174.68,1685.32 1195,1665 R15.1@1495,1665
NetR16_2: R16.2 U2.19 | length 301.7
  Top Layer w10: U2.19@2689.94,1825.27 2720.27,1825.27 2740,1845 2740,1945 2775,1980 2775,2020 2810,2055 R16.2@2814.49,2055
NetR17_2: R17.2 U3.19 | length 289.7
  Top Layer w10: U3.19@2691.54,535 2715,535 2740,560 2740,685.51 R17.2@2814.49,760
NetR28_2: R28.2 U2.16 | length 289.3
  Top Layer w10: U2.16@2689.94,1675.27 2730.27,1675.27 2745,1690 2745,1765 2780,1800 2780,1865 2790,1875 R28.2@2814.49,1875
NetR29_2: R29.2 U3.16 | length 268.5
  Top Layer w10: U3.16@2691.54,385 2730,385 2745,400 2745,470 2780,505 2780,545.51 R29.2@2814.49,580
NetR32_2: R32.2 U2.15 | length 153.4
  Top Layer w10: U2.15@2689.94,1625.27 2710.27,1625.27 2780,1695 R32.2@2814.49,1695
NetR33_2: R33.2 U3.15 | length 149.9
  Top Layer w10: U3.15@2691.54,335 2710,335 2775,400 R33.2@2814.51,400
NetR36_2: R36.2 U2.14 | length 528.4
  Top Layer w10: U2.14@2306.87,1625.27 2564.73,1625.27 2615,1575 R36.2@2814.49,1575
NetR37_2: R37.2 U3.14 | length 528.8
  Top Layer w10: U3.14@2308.46,335 2555,335 2610,280 R37.2@2814.49,280
NetR38_2: R38.2 U1.94 | length 216
  Top Layer w10: R38.2@225.51,1620 315,1620 348.11,1586.89 U1.94@427.76,1586.89
NetR39_1: R39.1 R51.2 R52.2 U4.1 | length 288.9
  Top Layer w10: R51.2@1040.51,3175 1039.49,3175 R52.2@979.49,3235 1039.49,3295 R39.1@1040.51,3295 1090.51,3345 U4.1@1136.94,3345
NetR49_1: R49.1 R50.1 R53.1 U4.7 | length 268.2
  Top Layer w10: U4.7@1363.06,3295 R49.1@1459.49,3295 1460.51,3295 R53.1@1520.51,3235 1460.51,3175 R50.1@1459.49,3175
NetR52_1: R52.1 R54.1 U4.2 | length 311.7
  Top Layer w10: R52.1@1045,3235 1085,3235 ; U4.2@1120,3295 U4.2@1136.94,3295 1100,3295 1085,3280 1085,3250 1085,3170 1085,3160 1120,3125 1140,3125 R54.1@1145,3120
NetR53_2: R53.2 R55.1 U4.6 | length 305.9
  Top Layer w10: R55.1@1304.49,3115 1349.49,3160 1400,3160 1415,3175 1415,3245 ; U4.6@1363.06,3245 1415,3245 ; R53.2@1459.49,3235 1449.49,3245 1415,3245
NetR90_1: R90.1 R95.2 R98.2 U12.1 | length 257.5
  Top Layer w10: R90.1@2520.51,1270 2518.06,1272.46 U12.1@2518.06,1360 2624.49,1360 ; R95.2@2624.49,1330 2624.49,1360 ; R98.2@2624.49,1390 2624.49,1360
NetR91_1: R91.1 R96.1 R99.1 U12.7 | length 286.5
  Top Layer w10: R91.1@2185.51,1270 2184.49,1270 R96.1@2124.49,1330 2125.51,1330 R99.1@2185.51,1390 2205.51,1410 U12.7@2291.94,1410
NetR98_1: R98.1 R103.1 U12.2 | length 208.9
  Top Layer w10: U12.2@2518.06,1410 2555,1410 2595,1450 R103.1@2624.49,1450 2684.49,1390 R98.1@2685.51,1390
NetR99_2: R99.2 R105.1 U12.6 | length 196.5
  Top Layer w10: R99.2@2124.49,1390 2125.51,1390 2195.51,1460 U12.6@2291.94,1460
NetR113_2: R113.2 R123.1 U14.4 | length 320.7
  Top Layer w10: U14.4@1697.6,1712.76 1697.6,1637.4 R113.2@1700,1635 1645,1635 1630,1620 1630,1530 1645,1515 R123.1@1699.49,1515
NetR114_2: R114.2 R119.1 U14.3 | length 153.2
  Top Layer w10: U14.3@1697.6,1807.24 1697.6,1897.09 R119.1@1700,1899.49 R114.2@1760,1899.49
PWM-1-A: R141.2 U5.3 | length 1113.5
  Top Layer w10: U5.3@1700,2919.61 1700,2955 1730,2985 2325,2985 2405,3065 2405,3200 2385,3220 2280,3220 2240.16,3259.84 R141.2@2240.16,3262.8
PWM-1-B: R143.2 U5.6 | length 1217.4
  Top Layer w10: U5.6@1550,2919.61 1550,2945 1630,3025 2135,3025 2170,3060 v1(2175,3060) ; v1(2445,3060) 2495,3110 2495,3207.64 R143.2@2550.16,3262.8 R143.2@2550.16,3259.84
  Bottom Layer w10: v1(2175,3060) v1(2445,3060)
PWM-2-A: R107.2 U5.8 | length 1122.9
  Top Layer w10: U5.8@1500,2620.39 1500,2680 1420,2760 1420,2985 1460,3025 1560,3025 1600,3065 1775,3065 1785,3075 1785,3195 1760,3220 1652.97,3220 R107.2@1610.16,3262.8
PWM-2-B: R108.2 U5.11 | length 1527.4
  Top Layer w10: U5.11@1650,2620.39 1650,2695 1615,2730 1485,2730 1440,2775 1440,2975 1470,3005 1575,3005 1615,3045 2060,3045 2090,3075 2090,3200 2065,3225 1962.97,3225 R108.2@1925.16,3262.8 R108.2@1922.8,3262.8
PWM-3-A: R132.2 U8.3 | length 1061.2
  Top Layer w10: R132.2@345.16,3262.8 315,3232.64 315,3075 340,3050 570,3050 635,2985 635,2840 670,2805 850,2805 885,2840 U8.3@885,2919.61
PWM-3-B: R133.2 U8.6 | length 405.4
  Top Layer w10: R133.2@655.16,3262.8 620,3227.64 620,3085 735,2970 U8.6@735,2919.61
PWM-HIN1-L: U1.39 U2.2 | length 1579.1
  Top Layer w10: U1.39@1022.24,1724.69 1210.31,1724.69 v1(1220,1715) ; v1(1220,1850) 1545,2175 1580,2175 2225,2175 2275.27,2225.27 U2.2@2306.87,2225.27
  Bottom Layer w10: v1(1220,1715) v1(1220,1850)
PWM-HIN1-R: U1.32 U3.2 | length 1729.7
  Top Layer w10: v1(950,1575) 961.89,1586.89 U1.32@1022.24,1586.89 ; v1(1255,1460) 1310,1460 1860,910 2255,910 2280,935 U3.2@2308.46,935
  Bottom Layer w10: v1(950,1575) 1075,1450 1245,1450 v1(1255,1460)
PWM-HIN2-L: U1.41 U2.3 | length 1535.9
  Top Layer w10: U1.41@1022.24,1764.06 1309.06,1764.06 1340,1795 1340,1840 1340,1933.14 1561.86,2155 2240,2155 2260.27,2175.27 U2.3@2306.87,2175.27
PWM-HIN2-R: U1.35 U3.3 | length 1839.3
  Top Layer w10: v1(915,1610) 950.94,1645.95 U1.35@1022.24,1645.95 ; v1(1290,1430) 1310,1430 1850,890 2303.46,890 U3.3@2308.46,885
  Bottom Layer w10: v1(915,1610) 915,1570 1055,1430 v1(1290,1430)
PWM-HIN3-L: U1.43 U2.4 | length 1471.2
  Top Layer w10: U1.43@1022.24,1803.43 1258.43,1803.43 1300,1845 v1(1305,1845) ; v1(1369.47,1857.11) 1380,1867.65 1380,1944.85 1570.15,2135 2255,2135 2264.73,2125.27 U2.4@2306.87,2125.27
  Bottom Layer w10: v1(1305,1845) 1357.35,1845 v1(1369.47,1857.11)
PWM-HIN3-R: U1.36 U3.4 | length 1942.8
  Top Layer w10: v1(900,1650) 915.63,1665.63 U1.36@1022.24,1665.63 ; v1(1255,1400) 1310,1400 1840,870 2250,870 2285,835 U3.4@2308.46,835
  Bottom Layer w10: v1(900,1650) 885,1635 885,1570 1045,1410 1245,1410 v1(1255,1400)
PWM-HO1-L: Q1.1 R1.2 R7.1 | length 659.7
  Top Layer w20: R1.2@2875.51,2355 R7.1@2875.51,2415 2980,2415 3020,2455 3360,2455 3414.45,2509.45 Q1.1@3436.06,2509.45
PWM-HO1-R: Q4.1 R4.2 R8.1 | length 645.2
  Top Layer w20: R8.1@2875.51,1120 R4.2@2875.51,1060 2985,1060 2990,1065 3360,1065 3414.45,1119.45 Q4.1@3436.06,1119.45
PWM-HO2-L: Q2.1 R2.2 R9.1 | length 688.8
  Top Layer w20: R9.1@2875.51,2235 R2.2@2875.51,2175 2920,2175 2940,2175 ; 2930,2175 2965,2175 3015,2125 3065,2125 ; 3050,2125 3360,2125 3414.45,2179.45 Q2.1@3436.06,2179.45
PWM-HO2-R: Q5.1 R5.2 R10.1 | length 765.9
  Top Layer w20: R10.1@2875.51,940 R5.2@2875.51,880 2980,880 3005,855 3005,765 3035,735 3065,735 ; 3055,735 3360,735 3414.45,789.45 Q5.1@3436.06,789.45
PWM-HO3-L: Q3.1 R3.2 R16.1 | length 802.5
  Top Layer w20: R16.1@2875.51,2055 R3.2@2875.51,1995 2950,1995 3020,1925 3020,1835 ; Q3.1@3436.06,1849.45 3414.45,1849.45 3360,1795 3045,1795 3020,1820 ; 3020,1820 3020,1835 ; 3020,1820 3020,1835
PWM-HO3-R: Q6.1 R6.1 R17.1 | length 859
  Top Layer w20: R17.1@2875.51,760 R6.1@2875.51,700 2905,700 3025,580 3025,420 3040,405 3350,405 3404.45,459.45 Q6.1@3436.06,459.45
PWM-IO-1: R81.2 U1.59 U5.1 U5.5 | length 1843
  Top Layer w10: U1.59@803.74,2002.24 803.74,2318.74 1045,2560 1410,2560 ; v1(1430,2675) 1430,2580 ; v1(1515,2760) 1600,2845 ; U5.5@1600,2919.61 1600,2845 ; U5.1@1800,2919.61 1800,2870 ; R81.2@1885,2870 1800,2870 ; 1410,2560 1430,2580 ; 1410,2560 1430,2580 ; 1600,2845 1790,2845 1800,2855 1800,2870
  Bottom Layer w10: v1(1430,2675) v1(1515,2760)
PWM-IO-2: R80.2 U1.60 U5.9 U5.13 | length 1723.9
  Top Layer w10: U1.60@784.06,2002.24 784.06,2344.05 v1(885,2445) ; v1(1070,2510) 1475,2510 1550,2585 U5.9@1550,2620.39 v1(1550,2670) ; U5.13@1750,2620.39 v1(1750,2670) ; 1765,2670 v1(1750,2670) ; R80.2@1890,2734.49 1825.51,2670 v1(1750,2670)
  Bottom Layer w10: v1(885,2445) 950,2510 v1(1070,2510) ; v1(1550,2670) v1(1750,2670)
PWM-IO-3: R79.2 U1.61 U8.1 U8.5 | length 1436.8
  Top Layer w10: U1.61@764.37,2002.24 764.37,2364.37 810,2410 R79.2@810,2479.49 924.49,2479.49 1025,2580 1025,2820 985,2860 U8.1@985,2919.61 985,2980 972.98,2992.02 802.02,2992.02 785,2975 U8.5@785,2919.61
PWM-LIN1-L: U1.40 U2.5 | length 1550.8
  Top Layer w10: U1.40@1022.24,1744.37 1315,1744.37 1329.37,1744.37 1400,1815 ; 1400,1840 1400,1815 ; U2.5@2306.87,2075.27 2269.73,2075.27 2230,2115 1578.43,2115 1400,1936.57 1400,1815
PWM-LIN1-R: U1.63 U3.5 | length 2264.7
  Top Layer w10: U1.63@725,2002.24 725,1720 v1(840,1605) ; v1(1290,1370) 1310,1370 1830,850 2220,850 2285,785 U3.5@2308.46,785
  Bottom Layer w10: v1(840,1605) 840,1585 1035,1390 1225,1390 1245,1370 v1(1290,1370)
PWM-LIN2-L: U1.42 U2.6 | length 1496.6
  Top Layer w10: U1.42@1022.24,1783.74 1283.74,1783.74 v1(1305,1805) ; v1(1430,1860) 1420,1870 1420,1928.28 1586.72,2095 2215,2095 2284.73,2025.27 U2.6@2306.87,2025.27
  Bottom Layer w10: v1(1305,1805) 1375,1805 v1(1430,1860)
PWM-LIN2-R: U1.64 U3.6 | length 2322.9
  Top Layer w10: U1.64@705.31,2002.24 705.31,1699.69 v1(800,1605) ; v1(1255,1340) 1310,1340 1820,830 2210,830 2260.59,779.41 2260.59,767.69 2280,748.28 2280,745 2290,735 U3.6@2308.46,735
  Bottom Layer w10: v1(800,1605) 800,1590 885,1505 1020,1370 1210,1370 1240,1340 v1(1255,1340)
PWM-LIN3-L: U1.44 U2.7 | length 1465.4
  Top Layer w10: U1.44@1022.24,1823.11 1233.11,1823.11 1295,1885 v1(1305,1885) ; v1(1450,1895) 1450,1930 1595,2075 2205,2075 2240,2040 2240,2015 2279.73,1975.27 U2.7@2306.87,1975.27
  Bottom Layer w10: v1(1305,1885) 1315,1895 v1(1450,1895)
PWM-LIN3-R: U1.65 U3.7 | length 2402.8
  Top Layer w10: U1.65@685.63,2002.24 685.63,1679.37 v1(760,1605) ; v1(1290,1310) 1310,1310 1810,810 2200.59,810 2240.59,770 2240.59,759.41 2260,740 2260,710 2285,685 U3.7@2308.46,685 U3.7@2290,685
  Bottom Layer w10: v1(760,1605) 760,1600 880,1480 1010,1350 1195,1350 1235,1310 v1(1290,1310)